# EAGLE board Atomic_V1.0__P-CAD-ASCII.Eagle-import-accel.ulp (EAGLE 7.7.0)
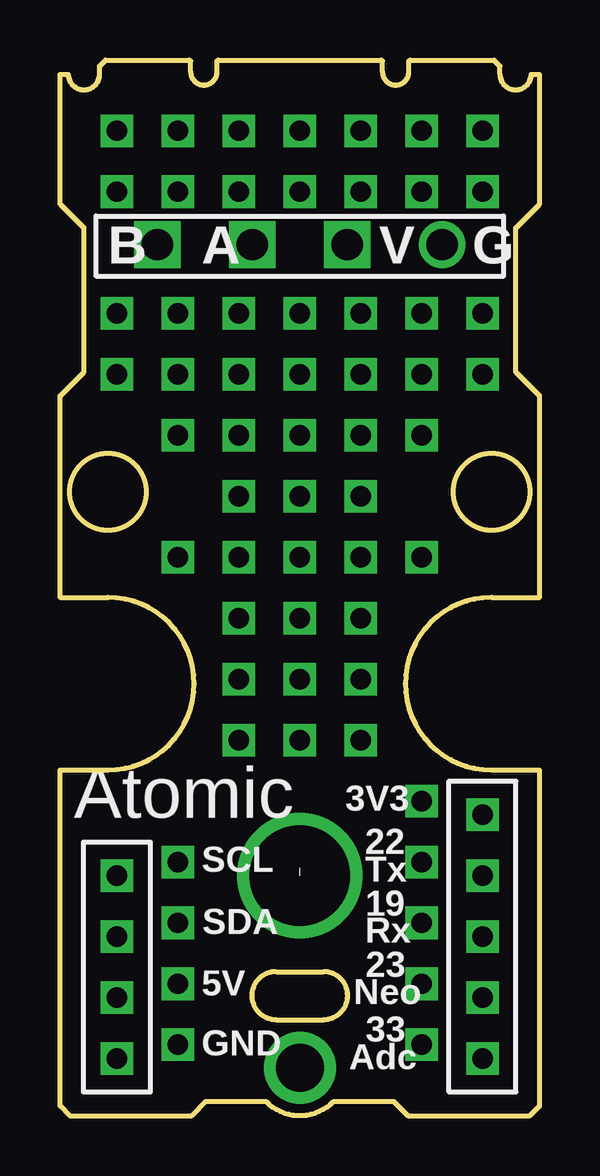
[diagram p0: board, top side]
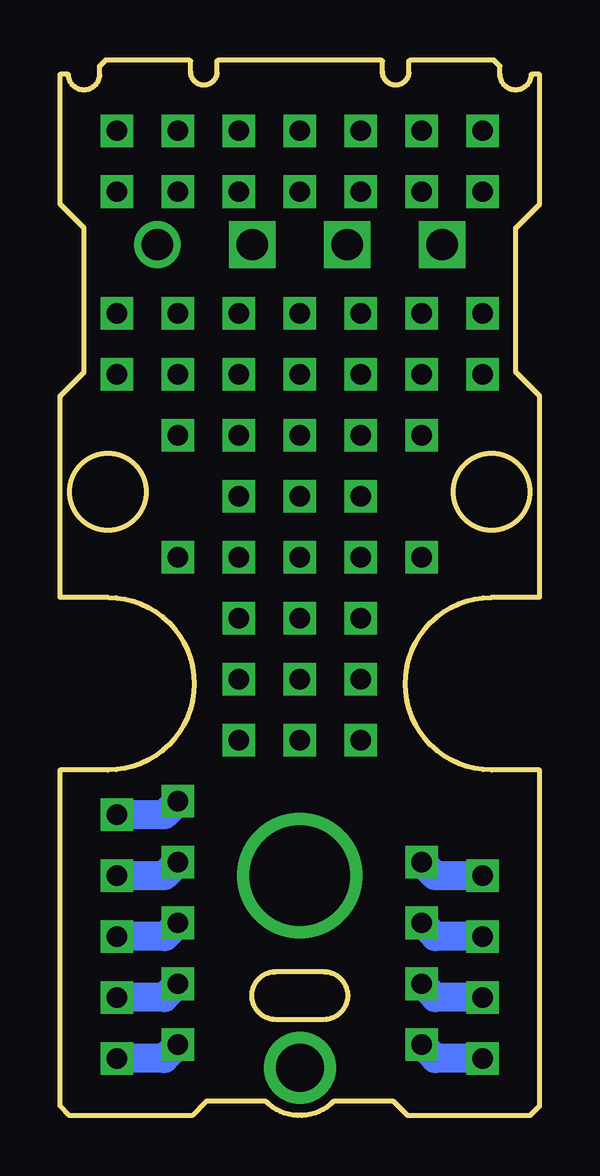
[diagram p1: board, bottom side, seen from below]

Size 20 x 44 mm. Coordinates in mm from the lower left corner, seen from the top.
Outline: 5.4,44 1.9,44 1.65,43.75 1.65,43.4 arc-180 0.35,43.4 0,43.4 0,38 1,37 1,31 0,30 0,21.6 2,21.6 arc-180 2,14.4 0,14.4 0,0.4 0.4,0 5.5,0 6.09,0.59 8.59,0.59 arc90 11.41,0.59 13.91,0.59 14.5,0 19.6,0 20,0.4 20,14.4 18,14.4 arc-180 18,21.6 20,21.6 20,30 19,31 19,37 20,38 20,43.4 19.65,43.4 arc-180 18.35,43.4 18.35,43.75 18.1,44 14.6,44
Outline: 5.45,43.95 5.45,43.5 arc180 6.55,43.5 6.55,43.95
Outline: 13.45,43.95 13.45,43.5 arc180 14.55,43.5 14.55,43.95
Outline: 6.6,44 13.4,44
Outline: 11,4 arc180 11,6 9,6 arc180 9,4 11,4
Outline: circle at 2,26 radius 1.6
Outline: circle at 18,26 radius 1.6
Copper layers (1*16): Top 0.035mm / dielectric 1.5mm / Bottom 0.035mm
Design rules "default": minimum track width 6mil, minimum drill 0.35mm, track to track 6mil, track to pad 6mil, pad to pad 6mil, via to via 6mil, smd to smd 6mil, copper to edge 40mil, drill to drill 6mil, minimum pad ring 10mil, minimum via ring 8mil, stop-mask expansion 4mil, vias tented up to drill 0mil, thermal gap 10mil

## Footprints (pad centres in the part's own frame; a part is rotated, then mirrored left to right if it is on the bottom)
P:EX165Y165D1651 = drill 4.2 pad 4.2: P$1 0,0
P:RRX55Y55D331 = drill 0.85 pad 1.071 square: P$1 0,0
P:EX79Y79D791 = drill 2 pad 2: P$1 0,0
P:RRX47Y47D331 = drill 0.85 pad 0.915 square: P$1 0,0
P:SX47Y47D331 = drill 0.85 pad 1.2 square: P$1 0,0
P:EX71Y71D511 = drill 1.3 pad 1.8: P$1 0,0
P:RRX71Y71D511 = drill 1.3 pad 1.383 square: P$1 0,0
P:SX71Y71D511 = drill 1.3 pad 1.8 square: P$1 0,0

## Placement (x,y rotation side)
DUMMY1  [P:EX165Y165D1651]  10,10 0 top
DUMMY2  [P:RRX55Y55D331]  4.92,2.95 0 top
DUMMY3  [P:RRX55Y55D331]  15.08,2.95 0 top
DUMMY4  [P:RRX55Y55D331]  4.92,5.49 0 top
DUMMY5  [P:RRX55Y55D331]  15.08,5.49 0 top
DUMMY6  [P:RRX55Y55D331]  4.92,8.03 0 top
DUMMY7  [P:RRX55Y55D331]  15.08,8.03 0 top
DUMMY8  [P:RRX55Y55D331]  4.92,10.57 0 top
DUMMY9  [P:RRX55Y55D331]  15.08,10.57 0 top
DUMMY10  [P:RRX55Y55D331]  15.08,13.11 0 top
DUMMY11  [P:EX79Y79D791]  10,2 0 top
DUMMY12  [P:RRX47Y47D331]  2.38,10 0 top
DUMMY13  [P:RRX47Y47D331]  2.38,7.46 0 top
DUMMY14  [P:RRX47Y47D331]  17.62,2.38 0 top
DUMMY15  [P:RRX47Y47D331]  17.62,4.92 0 top
DUMMY16  [P:RRX47Y47D331]  17.62,7.46 0 top
DUMMY17  [P:RRX47Y47D331]  17.62,10 0 top
DUMMY18  [P:RRX47Y47D331]  17.62,12.54 0 top
DUMMY19  [P:SX47Y47D331]  2.38,4.92 0 top
DUMMY20  [P:RRX47Y47D331]  2.38,2.38 0 top
DUMMY21  [P:RRX55Y55D331]  7.46,20.73 0 top
DUMMY22  [P:RRX55Y55D331]  7.46,18.19 0 top
DUMMY23  [P:RRX55Y55D331]  7.46,15.65 0 top
DUMMY24  [P:RRX55Y55D331]  4.92,38.51 0 top
DUMMY25  [P:RRX55Y55D331]  2.38,38.51 0 top
DUMMY26  [P:RRX55Y55D331]  10,15.65 0 top
DUMMY27  [P:RRX55Y55D331]  10,38.51 0 top
DUMMY28  [P:RRX55Y55D331]  7.46,38.51 0 top
DUMMY29  [P:RRX55Y55D331]  10,33.43 0 top
DUMMY30  [P:RRX55Y55D331]  7.46,33.43 0 top
DUMMY31  [P:RRX55Y55D331]  4.92,33.43 0 top
DUMMY32  [P:RRX55Y55D331]  2.38,33.43 0 top
DUMMY33  [P:RRX55Y55D331]  10,30.89 0 top
DUMMY34  [P:RRX55Y55D331]  7.46,30.89 0 top
DUMMY35  [P:RRX55Y55D331]  4.92,30.89 0 top
DUMMY36  [P:RRX55Y55D331]  2.38,30.89 0 top
DUMMY37  [P:RRX55Y55D331]  10,28.35 0 top
DUMMY38  [P:RRX55Y55D331]  7.46,28.35 0 top
DUMMY39  [P:RRX55Y55D331]  10,25.81 0 top
DUMMY40  [P:RRX55Y55D331]  7.46,25.81 0 top
DUMMY41  [P:RRX55Y55D331]  10,23.27 0 top
DUMMY42  [P:RRX55Y55D331]  7.46,23.27 0 top
DUMMY43  [P:RRX55Y55D331]  10,18.19 0 top
DUMMY44  [P:RRX55Y55D331]  10,20.73 0 top
DUMMY45  [P:RRX55Y55D331]  7.46,41.05 0 top
DUMMY46  [P:RRX55Y55D331]  10,41.05 0 top
DUMMY47  [P:RRX55Y55D331]  2.38,41.05 0 top
DUMMY48  [P:RRX55Y55D331]  4.92,41.05 0 top
DUMMY49  [P:RRX55Y55D331]  12.54,23.27 0 top
DUMMY50  [P:RRX55Y55D331]  12.54,25.81 0 top
DUMMY51  [P:RRX55Y55D331]  12.54,28.35 0 top
DUMMY52  [P:RRX55Y55D331]  17.62,30.89 0 top
DUMMY53  [P:RRX55Y55D331]  15.08,30.89 0 top
DUMMY54  [P:RRX55Y55D331]  12.54,30.89 0 top
DUMMY55  [P:RRX55Y55D331]  17.62,33.43 0 top
DUMMY56  [P:RRX55Y55D331]  15.08,33.43 0 top
DUMMY57  [P:RRX55Y55D331]  12.54,33.43 0 top
DUMMY58  [P:RRX55Y55D331]  12.54,38.51 0 top
DUMMY59  [P:RRX55Y55D331]  17.62,38.51 0 top
DUMMY60  [P:RRX55Y55D331]  15.08,38.51 0 top
DUMMY61  [P:RRX55Y55D331]  12.54,15.65 0 top
DUMMY62  [P:RRX55Y55D331]  12.54,18.19 0 top
DUMMY63  [P:RRX55Y55D331]  12.54,20.73 0 top
DUMMY64  [P:RRX55Y55D331]  15.08,41.05 0 top
DUMMY65  [P:RRX55Y55D331]  17.62,41.05 0 top
DUMMY66  [P:RRX55Y55D331]  12.54,41.05 0 top
DUMMY67  [P:EX71Y71D511]  15.94,36.3 0 top
DUMMY68  [P:RRX71Y71D511]  4.06,36.3 0 top
DUMMY69  [P:RRX71Y71D511]  8.02,36.3 0 top
DUMMY70  [P:SX71Y71D511]  11.98,36.3 0 top
DUMMY71  [P:RRX55Y55D331]  4.92,28.35 0 top
DUMMY72  [P:RRX55Y55D331]  15.08,28.35 0 top
DUMMY73  [P:RRX55Y55D331]  4.92,23.27 0 top
DUMMY74  [P:RRX55Y55D331]  15.08,23.27 0 top
DUMMY75  [EF154X154MID1]  10,2 0 top
DUMMY76  [EF154X154MID2]  10,2 0 top

## Library data of the parts
DUMMY1-DUMMY76 = Atomic_V1.0__P-CAD-ASCII

## Nets
S$1: DUMMY10.P$1 DUMMY18.P$1
S$2: DUMMY9.P$1 DUMMY17.P$1
S$3: DUMMY16.P$1
S$4: DUMMY5.P$1 DUMMY15.P$1
S$5: DUMMY3.P$1 DUMMY14.P$1
S$6: DUMMY8.P$1 DUMMY12.P$1
S$7: DUMMY6.P$1 DUMMY13.P$1
S$8: DUMMY4.P$1 DUMMY19.P$1
S$9: DUMMY2.P$1 DUMMY20.P$1

## Tracks (layer width: path | path; a pad name or v marks a point on that pad's centre or on a via)
S$1
  Bottom 1.2: DUMMY10.P$1 15.65,12.54 DUMMY18.P$1
S$2
  Bottom 1.2: DUMMY9.P$1 15.65,10 DUMMY17.P$1
S$3
  Bottom 1.2: 15.08,8 15.62,7.46 DUMMY16.P$1
S$4
  Bottom 1.2: DUMMY5.P$1 15.65,4.92 DUMMY15.P$1
S$5
  Bottom 1.2: DUMMY3.P$1 15.65,2.38 DUMMY14.P$1
S$6
  Bottom 1.2: DUMMY8.P$1 4.35,10 DUMMY12.P$1
S$7
  Bottom 1.2: DUMMY6.P$1 4.35,7.46 DUMMY13.P$1
S$8
  Bottom 1.2: DUMMY4.P$1 4.35,4.92 DUMMY19.P$1
S$9
  Bottom 1.2: DUMMY2.P$1 4.35,2.38 DUMMY20.P$1

## Text on the board
tPlace: ToDo: / - replace Pads for (error on the right outside of the board) | B | A | V | G | 3V3 | Atomic | 22 | SCL | Tx | SDA | 19 | Rx | 23 | 5V | Neo | 33 | GND | Adc